# Altium PCB Carte_Barriere_Optique.PcbDoc
Units mm, origin at the board's own origin, x right, y up, seen from the top; angles counter-clockwise.
Board outline 12.5 x 16 mm, 4 copper layers (Component Side, Ground Plane, Power Plane, Solder Side), stack 0.844 mm thick; 7 components, 5 nets, 16 pads, 0 vias.
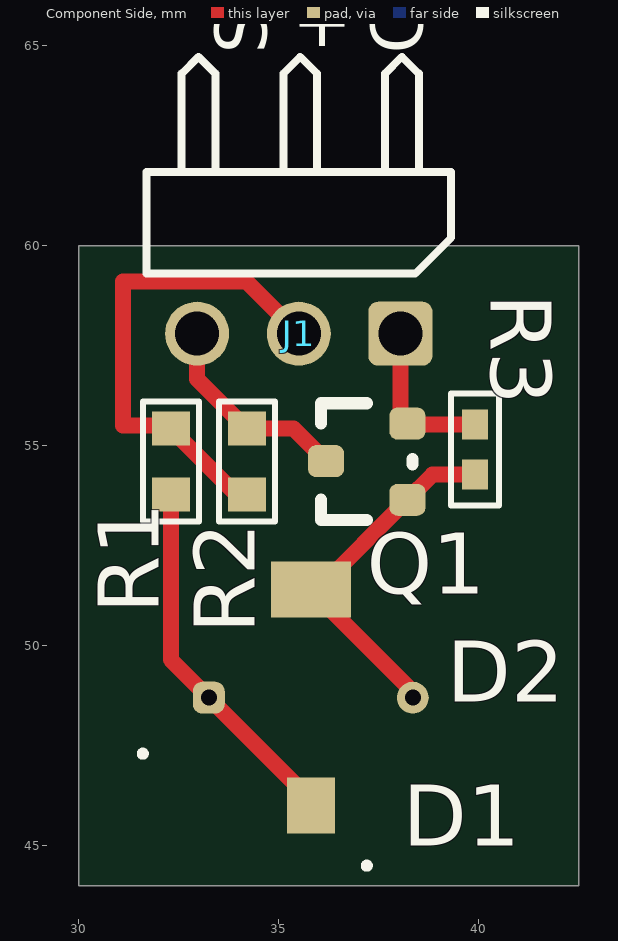
[diagram p0: Component Side view]
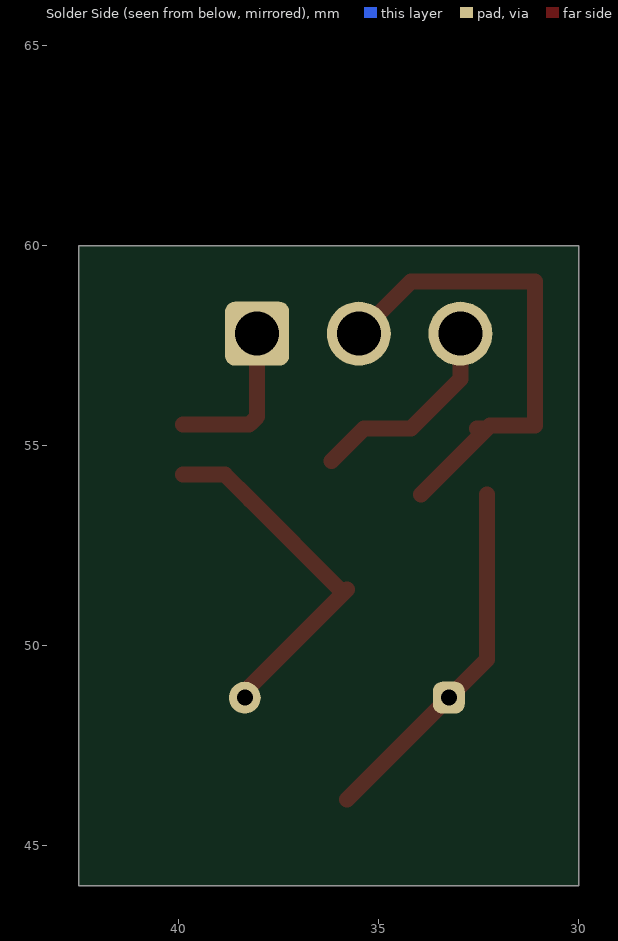
[diagram p1: Solder Side view, seen from below]
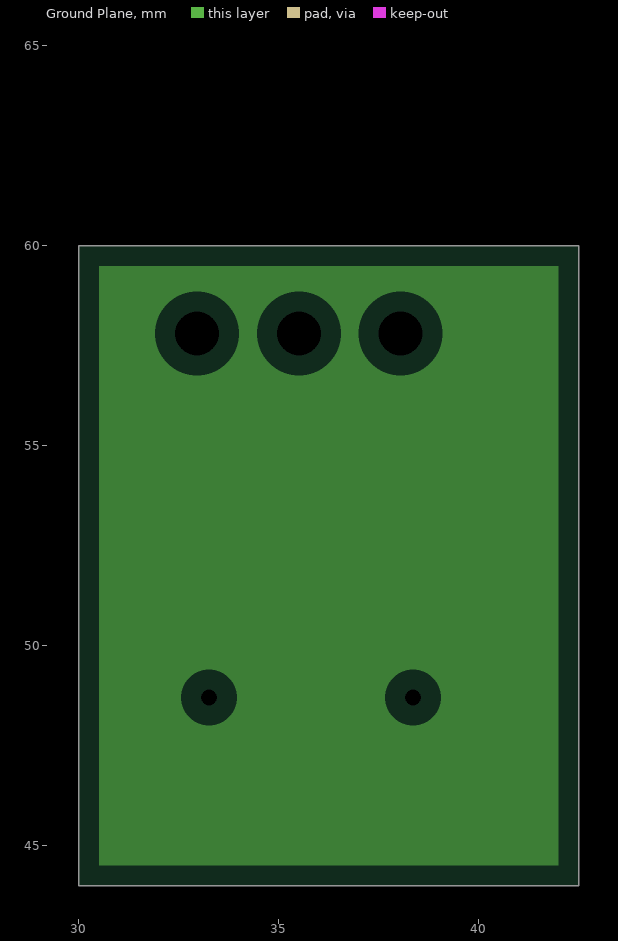
[diagram p2: Ground Plane, clearances drawn from the general rule]
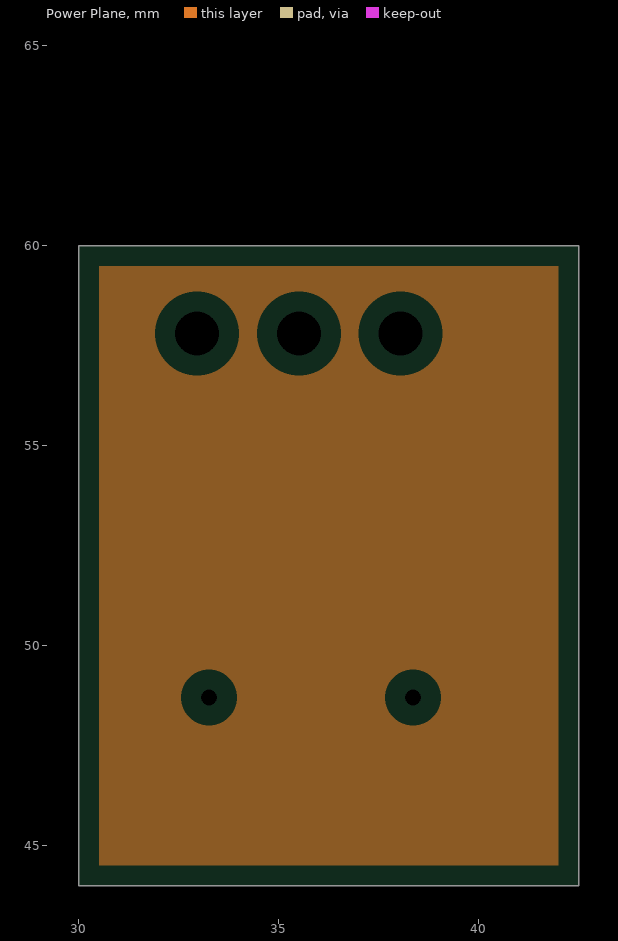
[diagram p3: Power Plane, clearances drawn from the general rule]

## Layer stack, top to bottom
Top Solder: solder mask 0.0102, Solder Resist, Dk 3.5
Component Side: signal copper 0.0356
Dielectric 1: core 0.32, FR-4, Dk 4.8
Ground Plane: plane copper 0.036
Dielectric 3: prepreg 0.127, Dk 4.2
Power Plane: plane copper 0.036
Dielectric 4: core 0.254, Dk 4.2
Solder Side: signal copper 0.0356
Bottom Solder: solder mask 0.0102, Solder Resist, Dk 3.5

## Board outline
30,44 42.5,44 42.5,60 30,60

## Design rules (kind name [scope] priority, off if disabled: settings)
AssemblyTestPointUsage [All] p1 off:
AssemblyTestpoint [All] p1 off: testpointundercomponent=TRUE minsize=1.016 maxsize=2.54 preferedsize=1.524 minholesize=0 maxholesize=1.016 preferedholesize=0.813 testpointgrid=0.025 usegrid=TRUE gridtolerance=0 allowsidetop=TRUE allowsidebottom=TRUE
BoardOutlineClearance [All] p1: gap=0.3
Clearance [All] p1: gap=0.125
ComponentClearance [All] p1: gap=0.2 collisioncheckmode=3 verticalgap=1 showdistances=FALSE
DiffPairsRouting [All] p1 off: maxlimit=0.254 minlimit=0.254 mostfreqgap=0.254 toplayer_minwidth=0.381 toplayer_maxwidth=0.381 toplayer_prefwidth=0.381 bottomlayer_minwidth=0.381 bottomlayer_maxwidth=0.381 bottomlayer_prefwidth=0.381 maxuncoupledlength=12.7
FabricationTestPointUsage TestPointUsage [All] p1 off: valid=0 allowmultiple=FALSE
FabricationTestpoint Testpoint [All] p1 off: side=3 testpointundercomponent=TRUE minsize=1.016 maxsize=2.54 preferedsize=1.524 minholesize=0 maxholesize=1.016 preferedholesize=0.813 testpointgrid=0.025 allowsidetop=TRUE allowsidebottom=TRUE usegrid=TRUE gridtolerance=0
FanoutControl Fanout_BGA [IsBGA] p1 off: bgadir=Out bgaviamode=Centered fanoutstyle=Auto fanoutdirection=Alternating viagrid=0.025 // Fanout_BGA (Default Rule)
FanoutControl Fanout_LCC [IsLCC] p2 off: bgadir=Out bgaviamode=Centered fanoutstyle=Auto fanoutdirection=Alternating viagrid=0.025 // Fanout_LCC (Default Rule)
FanoutControl Fanout_SOIC [IsSOIC] p3 off: bgadir=Out bgaviamode=Centered fanoutstyle=Auto fanoutdirection=Alternating viagrid=0.025 // Fanout_SOIC (Default Rule)
FanoutControl Fanout_Small [(CompPinCount < 5)] p4 off: bgadir=Out bgaviamode=Centered fanoutstyle=Auto fanoutdirection=OutThenIn viagrid=0.025 // Fanout_Small (Default Rule)
FanoutControl Fanout_Default [All] p5 off: bgadir=Out bgaviamode=Centered fanoutstyle=Auto fanoutdirection=Alternating viagrid=0.025 // Fanout_Default (Default Rule)
Height [All] p1: minheight=0 maxheight=13 prefheight=10
HoleSize [All] p1: absolutevalues=TRUE maxlimit=6 minlimit=0.15 maxpercent=80.000 minpercent=20.000
HoleToHoleClearance [All] p1: gap=0.4 allowstackedmicrovias=TRUE
MinimumAnnularRing [All] p1: minimumring=0.15
MinimumSolderMaskSliver [All] p1: minsoldermaskwidth=0.15
MinimumSolderMaskSliver SilkscreenOverComponentPads [All] p2 off: minsoldermaskwidth=0.254
NetAntennae [All] p1 off: netantennaetolerance=0
PlaneClearance [All] p1: clearance=0.5
PlaneConnect [All] p1: planeconnectstyle=Relief reliefexpansion=0.4 reliefentries=4 reliefconductorwidth=0.3 reliefairgap=0.2
PolygonConnect [All] p1: connectstyle=Relief reliefconductorwidth=0.25 reliefentries=4 polygonreliefangle="90 Angle" airgapwidth=0.254
RoutingCorners [All] p1: cornerstyle=45-Degree minsetback=1.5 maxsetback=2.54
RoutingVias [All] p1: holewidth=0.2 width=0.5 viastyle="Through Hole" minholewidth=0.2 minwidth=0.4 maxholewidth=0.2 maxwidth=0.6
SilkToSilkClearance [All] p1 off: silktosilkclearance=0.1
SolderMaskExpansion [All] p1: expansion=0.075
Width [All] p1: maxlimit=4 minlimit=0.125 preferedwidth=0.4
10 further rules are at their usual default settings.

## Components (designator, comment, footprint, x,y, rotation, side; value= is the part's Value field where it differs from the comment)
D1 "BPW34S" BPW34 35.8,48.7 r0 top
D2 "BPW34S" BPW34-S 35.8,48.7 r90 top
J1 "61300311021" 61300311021 35.5,57.8 r180 top
Q1 "NSS12201LT1G" SOT-23 37.2,54.6 r90 top
R1 "RC0603FR-07330RL" RESC1608X06N 32.3,54.6 r270 top
R2 "RC0603FR-071KL" RESC1608X06N 34.2,54.6 r270 top
R3 "Manufacturer Part Number" RESC1005X04N 39.9,54.9 r270 top

## Footprints (in the part's own frame and the unit in brackets; to place one, negate y for a bottom-side part, rotate by r counter-clockwise, add the part's x,y. Pads: shape width x height; smd on the part's side, far side on the other; paste and mask are expansions set on the pad)
61300311021 [mm] "3 pins, 1 row, right angled, gold plating"
  rrect30% 1.6x1.6 hole 1.1: 1(-2.54,0)
  round 1.6 hole 1.1: 2(0,0) 3(2.54,0)
  silkscreen extent -3.81,-6.92 3.81,-1.5, body extent -3.81,-10.06 3.81,0.3, height 2.55
BPW34 [mm] "BPW34"
  rrect60% 0.8x0.8 hole 0.4: 1(-2.55,0)
  round 0.8 hole 0.4: 2(2.55,0)
  silkscreen extent -4.25,-1.45 -4.15,-1.35, body extent -3.25,-1.95 3.25,1.95, height 0.7
BPW34-S [mm] "BPW34-S"
  rect 1.4x1.2 smd: 1(-2.7,0)
  rect 1.4x2 smd: 2(2.7,0)
  silkscreen extent -4.25,-1.45 -4.15,-1.35, body extent -3.25,-1.95 3.25,1.95, height 1.2
RESC1005X04N [mm] "Chip Resistor, 2-Leads, Body 1,1x0,5mm, IPC Medium Density"
  rect 0.75x0.65 smd: 1(-0.625,0) 2(0.625,0)
  silkscreen extent -1.4,-0.6 1.4,0.6, body extent -0.5,-0.25 0.5,0.25, height 0.35
RESC1608X06N [mm] "Chip Resistor, 2-Leads, Body 1,6x0,8mm, IPC Medium Density"
  rect 0.85x0.95 smd: 1(-0.825,0) 2(0.825,0)
  silkscreen extent -1.5,-0.7 1.5,0.7, body extent -0.77,-0.42 0.78,0.43, height 0.45
SOT-23 [mm]
  rrect50% 0.8x0.9 smd: 1(-0.953,-1.016) 2(0.953,-1.016) 3(0.013,1.016)
  silkscreen extent -1.46,-1.14 1.46,1.14, body extent -1.5,-1.13 1.5,1.13, height 1.22

## Part data
D1: library part BPW34, "Photodiode 850nm 20ns 120° 2-SMD, Gull Wing"
D2: "Photodiode 850nm 20ns 120° 2-SMD, Gull Wing"
J1: "CONN HEADER 3p horiz. 2.54mm"
Q1: "Bipolar (BJT) Transistor NPN 12V 2A 150MHz 460mW Surface Mount SOT-23-3 (TO-236)"
R1: "RES SMD 330 OHM 1% 1/10W 0603"
R2: "RES SMD 1K OHM 1% 1/10W 0603"
R3: library part RC0402FR-074K7L, "RES SMD 4K7 OHM 1% 1/16W 0402"

## Nets (pads, with @x,y where several pads share a name; then routed paths per layer and width w, separated by ;. In a path a pad name is that pad's centre, name@x,y a point inside that pad or via, vN(x,y) a via of type N, cw(c..) or ccw(c..) an arc to the next point about the centre after c; other vN are vias at no path point)
5L: J1.2 R1.1 R2.2 | length 12.2
  Component Side w0.4: R1.1@32.225,55.5 31.1,55.5 31.1,59.1 34.2,59.1 J1.2 ; R1.1@32.55,55.425 R1.1 R2.2@33.95,53.775
GND: J1.1 Q1.2 R3.1 | length 4
  Component Side w0.4: J1.1 38.04,55.728 Q1.2 38.243,55.525 R3.1
NetD1_1: D1.1 D2.1 R1.2 | length 9.1
  Component Side w0.4: R1.2 32.3,49.65 D1.1 D2.1@35.8,46.15
NetD1_2: D1.2 D2.2 Q1.1 R3.2 | length 8.7
  Component Side w0.4: D2.2 D1.2@38.35,48.85 ; D2.2@35.969,51.4 Q1.1 38.843,54.275 R3.2
SIG: J1.3 Q1.3 R2.1 | length 5.2
  Component Side w0.4: J1.3 32.96,56.665 R2.1 35.372,55.425 Q1.3

## Polygon pours and split planes (outlines as drawn)
no net on Ground Plane (split plane): 41.99,44.51 30.51,44.51 30.51,59.49 41.99,59.49
no net on Power Plane (split plane): 41.99,44.51 30.51,44.51 30.51,59.49 41.99,59.49

## Silkscreen, mask and mechanical layers (free items; w line width, h text height)
Mechanical 1:
  the board outline again, w0.254

## Text inside footprints (layer, text, board x,y; h text height)
J1: Top Overlay "SIG / +5V / GND" at 38.6,64.8 h1.3 r90